# Altium PCB Copy of PCB_soldeerstation.PcbDoc
Units mm, origin at the board's own origin, x right, y up, seen from the top; angles counter-clockwise.
Board outline 142.24 x 151.13 mm, 2 copper layers (Top Layer, Bottom Layer); 76 components, 77 nets, 276 pads, 0 vias.
Unrouted connection lines stored in the file: 181.
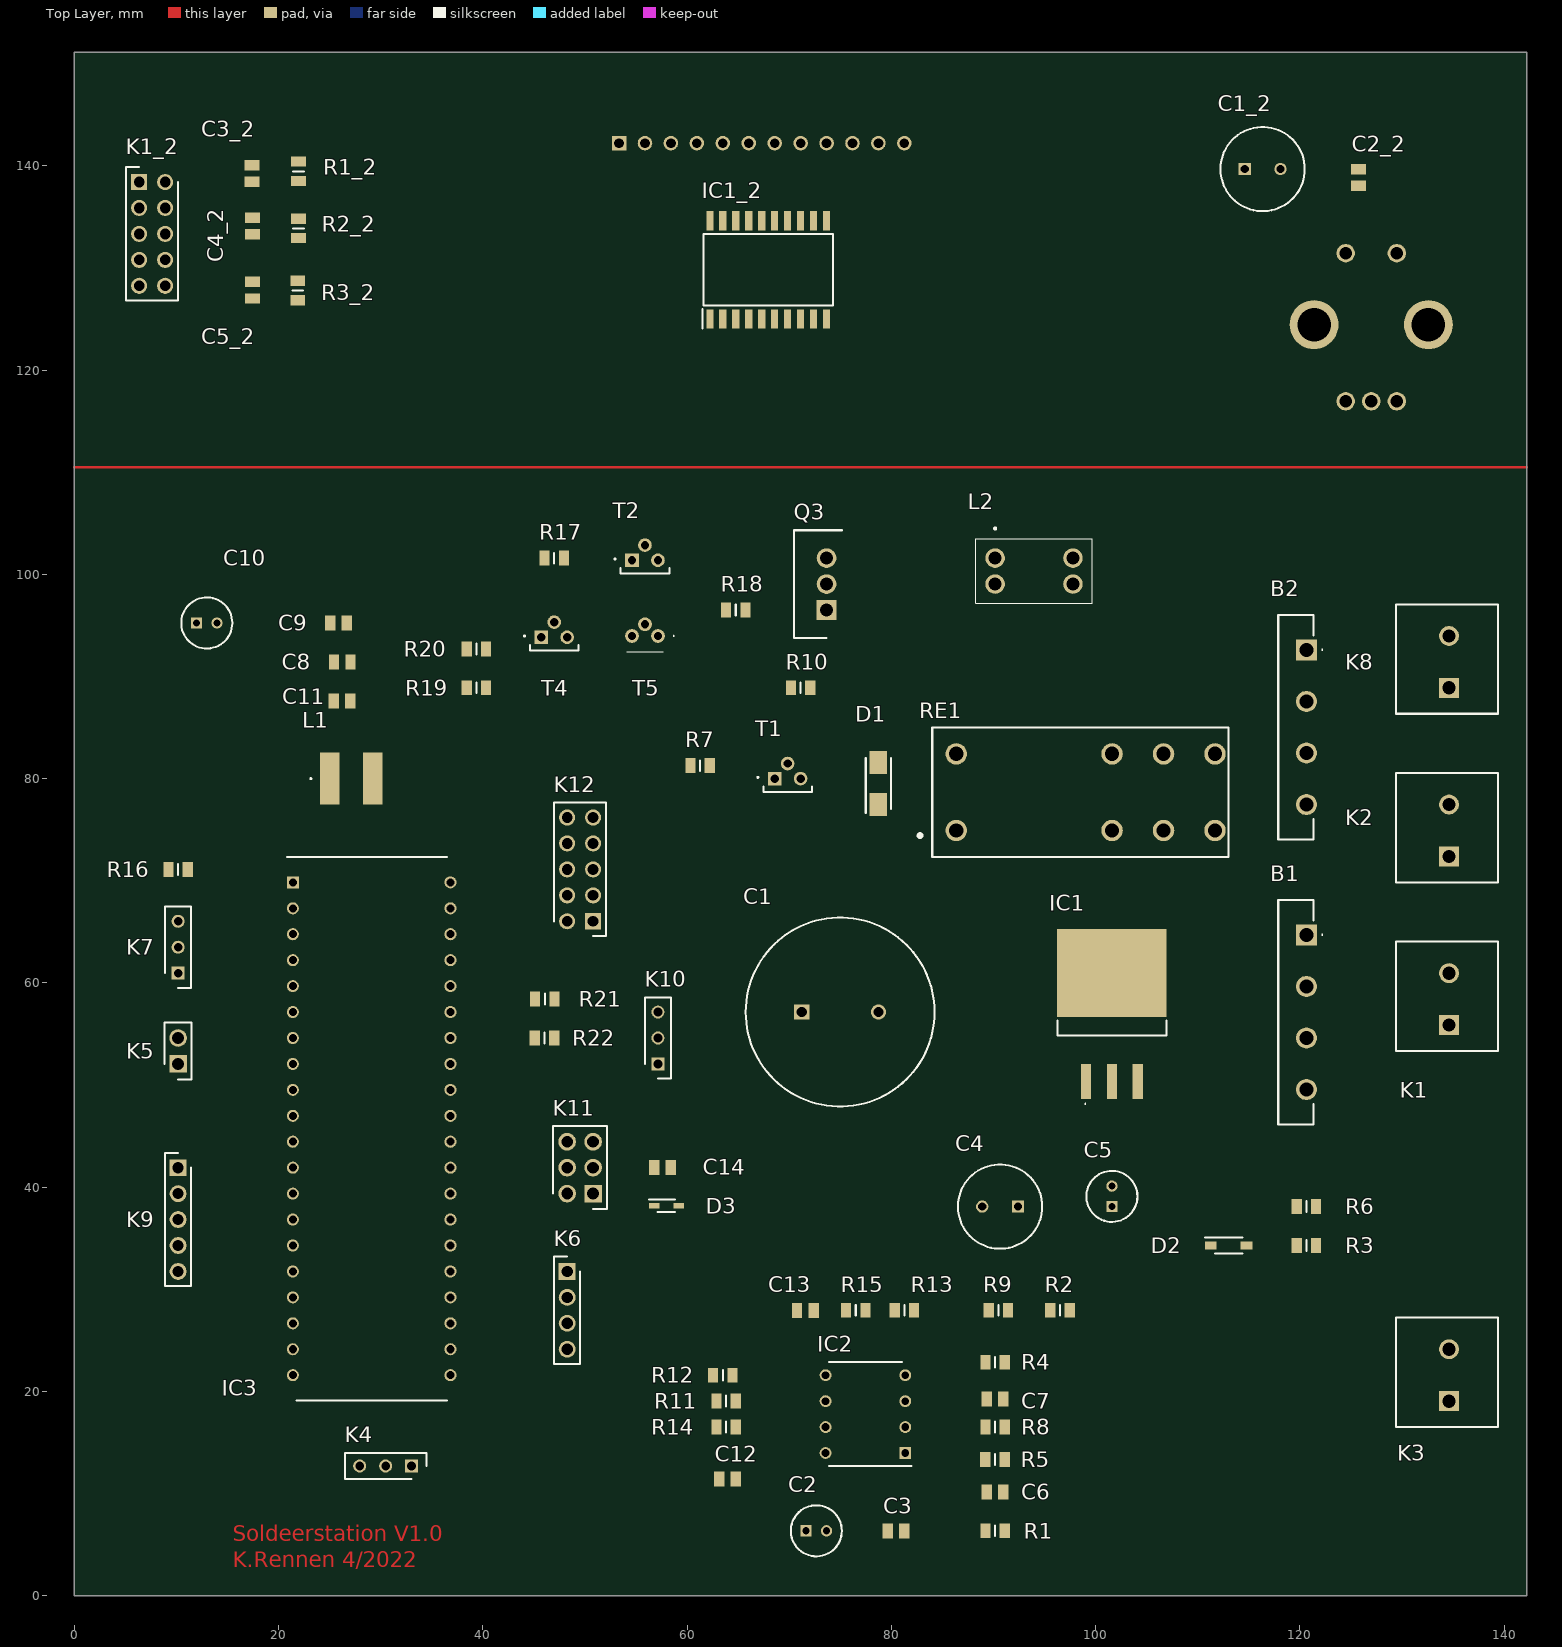
[diagram p0: Top Layer view]
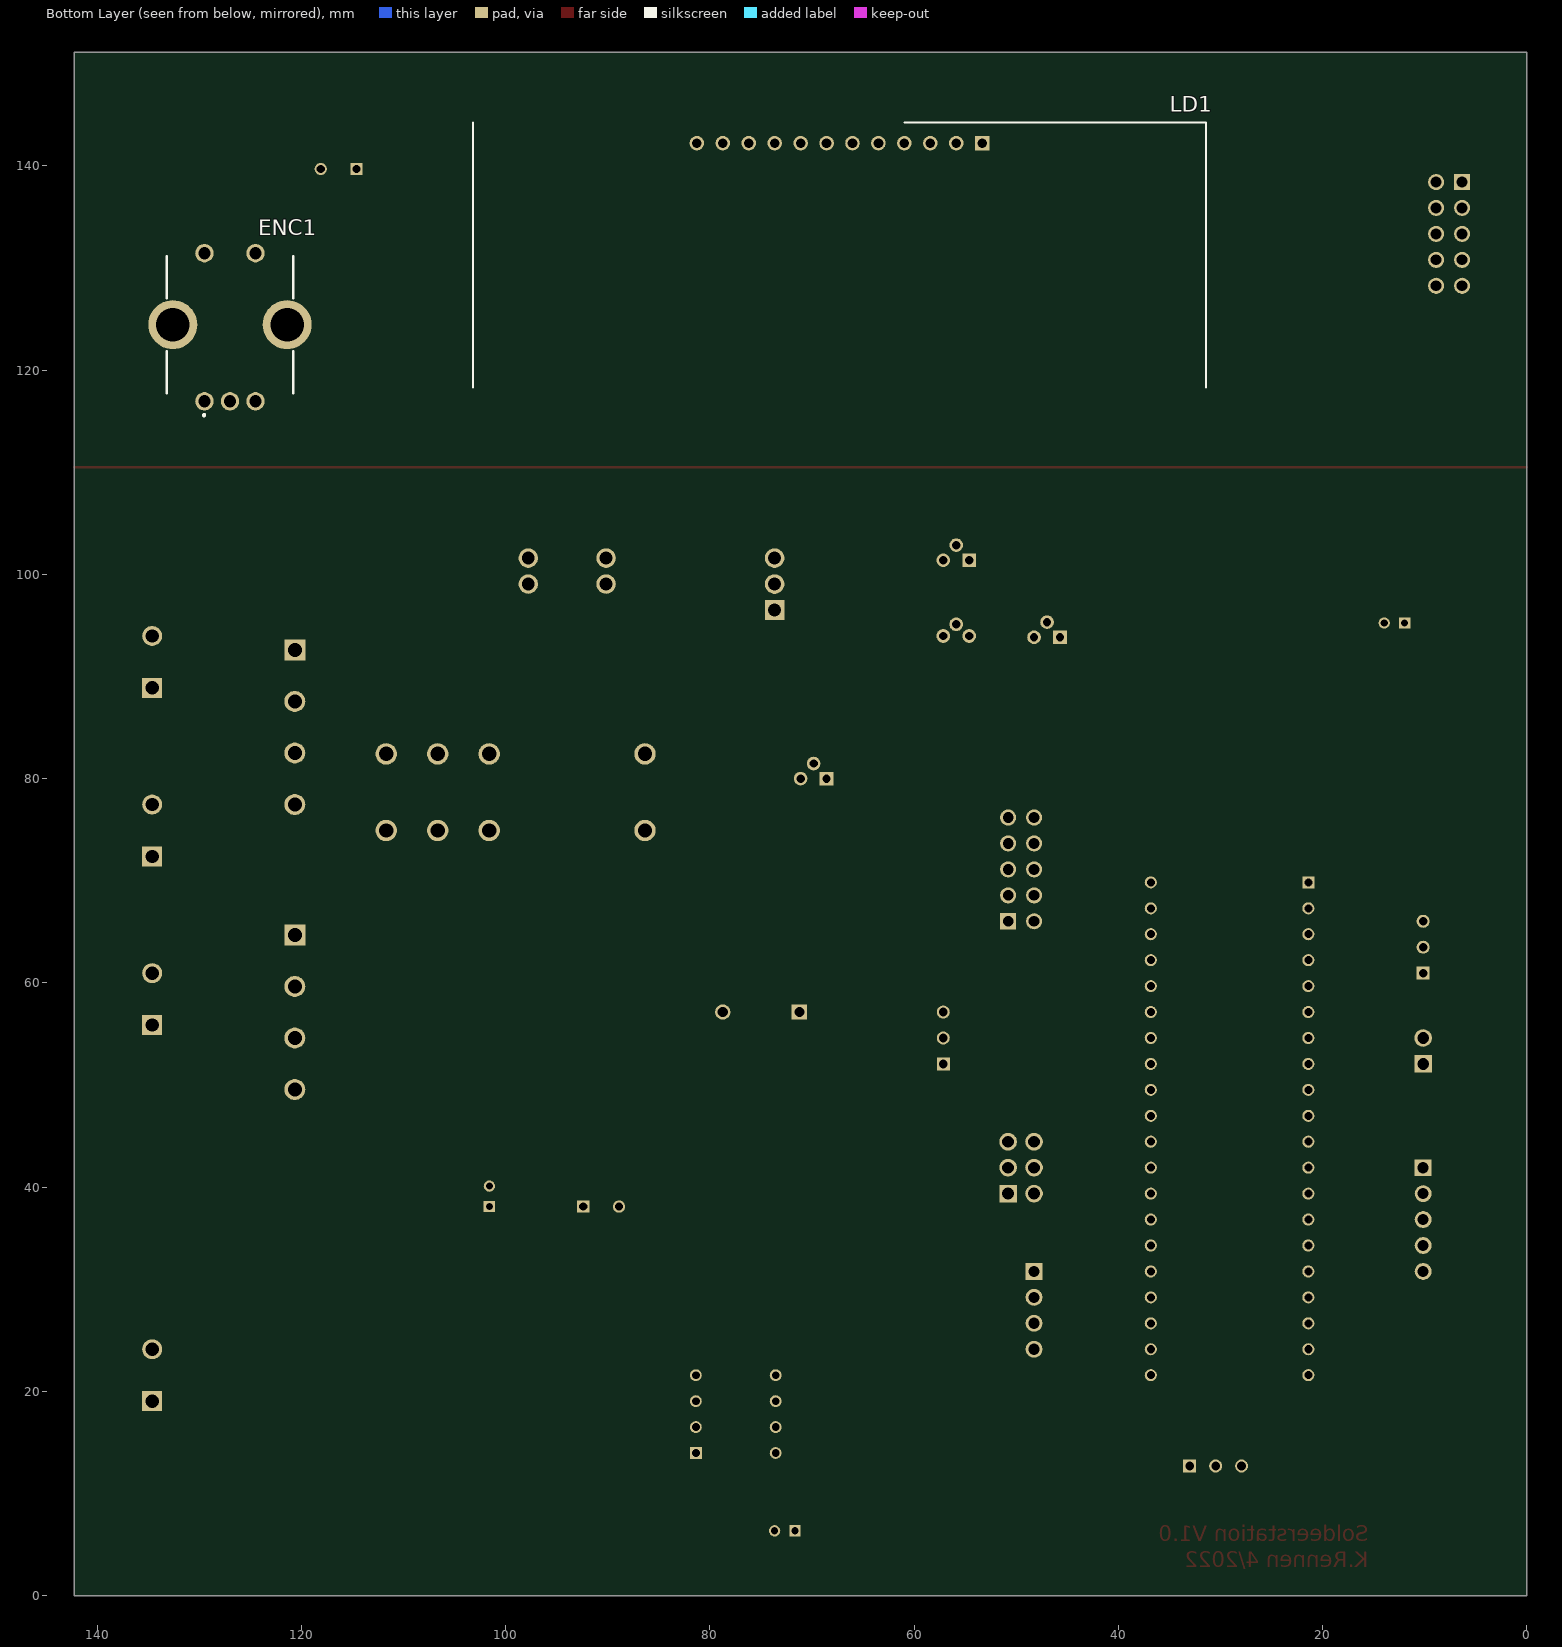
[diagram p1: Bottom Layer view, seen from below]

## Layer stack, top to bottom
Top Solder: solder mask 0.0102, Solder Resist, Dk 3.5
Top Layer: signal copper 0.0356
Dielectric 1: dielectric 0.32, FR-4, Dk 4.8
Bottom Layer: signal copper 0.0356
Bottom Solder: solder mask 0.0102, Solder Resist, Dk 3.5

## Board outline
0,0 0,151.13 142.24,151.13 142.24,0

## Design rules (kind name [scope] priority, off if disabled: settings)
Clearance [All] p1: gap=0.254 ignorepadtopadclearanceinfootprint=FALSE except(0: Arc-Hole Track-Hole SMDPad-Hole THPad-Hole Via-Hole Fill-Hole Poly-Hole Region-Hole Text-Hole)
PolygonConnect [All] p1: connectstyle=Relief reliefconductorwidth=0.254 reliefentries=4 polygonreliefangle="90 Angle" airgapwidth=0.254
RoutingVias [All] p1: holewidth=0.6 width=1.1 viastyle="Through Hole" minholewidth=0.6 minwidth=1.1 maxholewidth=0.6 maxwidth=1.1
SolderMaskExpansion [All] p1: expansion=0.102 istentingtop=FALSE
Width [All] p1: maxlimit=1.27 minlimit=0.635 preferedwidth=0.635 minimp=50.000000 maximp=50.000000 favimp=50.000000
30 further rules are at their usual default settings.

## Components (designator, comment, footprint, x,y, rotation, side; value= is the part's Value field where it differs from the comment)
B1 "bruggelijkrichter" GBU606G 120.65,64.71 r90 top
B2 "bruggelijkrichter" GBU606G 120.65,92.62 r90 top
C1 "4700uF" 4700uf 71.24,57.15 r0 top
C1_2 "100uF" 100uf 114.61,139.7 r0 top
C2 "10uF" 10uf 71.66,6.35 r0 top
C2_2 "100nF" 100nF 125.73,138.89 r90 top
C3 "100nF" 100nF 80.47,6.35 r0 top
C3_2 "10nF" 10nF 17.405,139.251 r90 top
C4 "100uF" 100uf 92.4,38.1 r180 top
C4_2 "10nF" 10nF 17.439,134.115 r90 top
C5 "10uF" 10uf 101.6,38.1 r90 top
C5_2 "10nF" 10nF 17.439,127.838 r90 top
C6 "10nF" 10nF 90.17,10.16 r0 top
C7 "10nF" 10nF 90.17,19.259 r0 top
C8 "100nF" 100nF 26.237,91.443 r0 top
C9 "100nF" 100nF 25.86,95.25 r0 top
C10 "10uF" 10uf 11.97,95.25 r0 top
C11 "100nF" 100nF 26.21,87.63 r0 top
C12 "10nF" 10nF 63.96,11.43 r0 top
C13 "10nF" 10nF 71.58,27.94 r0 top
C14 "100nF" 100nF 57.61,41.91 r0 top
D1 "FM4007W-W" fm4007 78.74,79.52 r90 top
D2 "MMSZ4689T1G zener" mmsz4 113.03,34.29 r0 top
D3 "SMMDL914T1G" smmdl914 57.982,38.183 r0 top
ENC1 "PEC11R-4225F-S0024 encoder" PEC11R-4225F-S0024 127,124.46 r180 bottom
IC1 "TL780-05CKTTR" TL78005CKTTR 101.6,57.105 r0 top net-tie
IC1_2 "TM1637" tm1637 67.945,129.82 r90 top
IC2 "MCP6002-E_P dual opamp" mcp6002 77.47,17.78 r180 top
IC3 "ATMEGA4809-PF" ATMEGA4809-PF 29.115,45.72 r0 top
K1 "schroefconnector" schroefconnector 134.62,55.88 r90 top
K1_2 "10 boxheader" 10BoxHeader 6.35,138.43 r270 top
K2 "schroefconnector" schroefconnector 134.62,72.39 r90 top
K3 "schroefconnector" schroefconnector 134.62,19.05 r90 top
K4 "1x3header" HDR1X3 33.02,12.7 r180 top
K5 "1x2header" HDR1X2 10.16,52.07 r90 top
K6 "1x4header" HDR1X4 48.26,31.75 r270 top
K7 "1x3header" HDR1X3 10.16,60.96 r90 top
K8 "schroefconnector" schroefconnector 134.62,88.9 r90 top
K9 "1x5header" HDR1X5 10.16,41.91 r270 top
K10 "1x3header" HDR1X3 57.15,52.07 r90 top
K11 "2x3header" HDR2X3 50.8,39.37 r90 top
K12 "10 boxheader" 10BoxHeader 50.8,66.04 r90 top
L1 "smoorspoel" smoorspoel 27.11,80.01 r0 top
L2 "cmsmoorspoel" CMsmoorspoel 90.17,101.6 r270 top
LD1 "KW4-804CVB" kw4 60.96,142.24 r270 bottom
Q3 "IRF9Z34NPBF" irf9z34npbf 73.66,96.52 r90 top
R1 "18k" 18k 90.17,6.35 r0 top
R1_2 "10k" 10k 21.939,139.481 r90 top
R2 "1M" 1M 96.52,27.94 r0 top
R2_2 "10k" 10k 21.939,133.885 r90 top
R3 "68k" 68k 120.65,34.29 r0 top
R3_2 "10k" 10k 21.87,127.804 r90 top
R4 "5k6" 5k6 90.17,22.86 r0 top
R5 "5k6" 5k6 90.151,13.333 r0 top
R6 "10k" 10k 120.65,38.1 r0 top
R7 "10k" 10k 61.28,81.28 r0 top
R8 "100E" 100ohm 90.17,16.51 r0 top
R9 "10M" 10M 90.49,27.94 r0 top
R10 "4k7" 4k7 71.12,88.9 r0 top
R11 "18k" 18k 63.82,19.05 r0 top
R12 "18k" 18k 63.5,21.59 r0 top
R13 "5k6" 5k6 81.28,27.94 r0 top
R14 "5k6" 5k6 63.82,16.51 r0 top
R15 "100E" 100ohm 76.52,27.94 r0 top
R16 "4k7" 4k7 10.16,71.12 r180 top
R17 "4k7" 4k7 46.99,101.6 r0 top
R18 "100E" 100ohm 64.77,96.52 r0 top
R19 "10k" 10k 39.37,88.9 r0 top
R20 "4k7" 4k7 39.37,92.71 r0 top
R21 "4k7" 4k7 46.069,58.429 r0 top
R22 "4k7" 4k7 46.04,54.61 r0 top
RE1 "RT424005 relais" RT42005 86.36,78.68 r0 top
T1 "BC547" BC547CBU 68.58,80.137 r0 top
T2 "BC547" BC547CBU 54.61,101.52 r0 top
T4 "BC547" BC547CBU 45.72,93.98 r0 top
T5 "BC557" BC557C 57.15,93.98 r180 top

## Footprints (in the part's own frame and the unit in brackets; to place one, negate y for a bottom-side part, rotate by r counter-clockwise, add the part's x,y. Pads: shape width x height; smd on the part's side, far side on the other; paste and mask are expansions set on the pad)
1M [mm]
  rect 1x1.45 smd: 1(-0.95,0) 2(0.95,0)
  silkscreen extent 0,-0.53 0,0.53, body extent -1,-0.63 1,0.63, height 0.65
4k7 [mm]
  rect 1x1.45 smd: 1(-0.95,0) 2(0.95,0)
  silkscreen extent 0,-0.53 0,0.53, body extent -1,-0.63 1,0.63, height 0.65
5k6 [mm]
  rect 1x1.45 smd: 1(-0.95,0) 2(0.95,0)
  silkscreen extent 0,-0.53 0,0.53, body extent -1,-0.63 1,0.63, height 0.65
10BoxHeader [mm]
  rect 1.575x1.575 hole 1.05: 1(0,0)
  round 1.575 hole 1.05: 2(0,2.54) 3(2.54,0) 4(2.54,2.54) 5(5.08,0) 6(5.08,2.54) 7(7.62,0) 8(7.62,2.54) 9(10.16,0) 10(10.16,2.54)
  silkscreen extent -1.46,-1.27 11.62,3.81, body extent -1.27,-1.27 11.43,3.81, height 8.64
10k [mm]
  rect 1x1.45 smd: 1(-0.95,0) 2(0.95,0)
  silkscreen extent 0,-0.52 0,0.52, body extent -1,-0.63 1,0.63, height 0.65
10M [mm]
  rect 1x1.45 smd: 1(-0.95,0) 2(0.95,0)
  silkscreen extent 0,-0.53 0,0.53, body extent -1,-0.63 1,0.63, height 0.65
10nF [mm]
  rect 1.02x1.47 smd: 1(-0.81,0) 2(0.81,0)
  body extent -1,-0.63 1,0.63, height 0.94
10uf [mm]
  rect 1.1x1.1 hole 0.7: 1(0,0)
  round 1.1 hole 0.7: 2(2,0)
  silkscreen extent -1.5,-2.5 3.5,2.5
18k [mm]
  rect 1x1.45 smd: 1(-0.95,0) 2(0.95,0)
  silkscreen extent 0,-0.53 0,0.53, body extent -1,-0.63 1,0.63, height 0.65
68k [mm]
  rect 1x1.45 smd: 1(-0.95,0) 2(0.95,0)
  silkscreen extent 0,-0.53 0,0.53, body extent -1,-0.63 1,0.63, height 0.65
100nF [mm]
  rect 1.02x1.47 smd: 1(-0.81,0) 2(0.81,0)
  body extent -1,-0.63 1,0.63, height 0.94
100ohm [mm]
  rect 1x1.45 smd: 1(-0.95,0) 2(0.95,0)
  silkscreen extent 0,-0.53 0,0.53, body extent -1,-0.63 1,0.63, height 0.65
100uf [mm]
  rect 1.2x1.2 hole 0.8: 1(0,0)
  round 1.2 hole 0.8: 2(3.5,0)
  silkscreen extent -2.38,-4.12 5.87,4.12
4700uf [mm]
  rect 1.5x1.5 hole 1: 1(0,0)
  round 1.5 hole 1: 2(7.5,0)
  silkscreen extent -5.5,-9.25 13,9.25
ATMEGA4809-PF [mm]
  rect 1.184x1.184 hole 0.784: 1(-7.715,24.13)
  round 1.184 hole 0.784: 2(-7.715,21.59) 3(-7.715,19.05) 4(-7.715,16.51) 5(-7.715,13.97) 6(-7.715,11.43) 7(-7.715,8.89) 8(-7.715,6.35) 9(-7.715,3.81) 10(-7.715,1.27) 11(-7.715,-1.27) 12(-7.715,-3.81) 13(-7.715,-6.35) 14(-7.715,-8.89) 15(-7.715,-11.43) 16(-7.715,-13.97) 17(-7.715,-16.51) 18(-7.715,-19.05) 19(-7.715,-21.59) 20(-7.715,-24.13) 21(7.715,-24.13) 22(7.715,-21.59) 23(7.715,-19.05) 24(7.715,-16.51) 25(7.715,-13.97) 26(7.715,-11.43) 27(7.715,-8.89) 28(7.715,-6.35) 29(7.715,-3.81) 30(7.715,-1.27) 31(7.715,1.27) 32(7.715,3.81) 33(7.715,6.35) 34(7.715,8.89) 35(7.715,11.43) 36(7.715,13.97) 37(7.715,16.51) 38(7.715,19.05) 39(7.715,21.59) 40(7.715,24.13)
  silkscreen extent -8.31,-26.61 7.37,26.61, body extent -7.86,-25.88 7.86,25.88, height 6.35
BC547CBU [mm]
  rect 1.333x1.333 hole 0.82: 1(0,-0.127)
  round 1.333 hole 0.82: 2(1.27,1.35) 3(2.54,-0.127)
  silkscreen extent -1.7,-1.43 3.65,0.05, body extent -1.11,-1.43 3.65,2.19, height 5.43
BC557C [mm]
  round 1.35 hole 0.81: 1(0,0) 2(1.27,-1.143) 3(2.54,0)
  silkscreen extent -1.6,-0.05 3.07,1.55
CMsmoorspoel [mm]
  round 1.905 hole 1.27: 1(0,0) 2(2.54,0) 3(2.54,7.62) 4(0,7.62)
  silkscreen extent -3,-1.88 4.42,9.5, body extent -1.88,-1.88 4.42,9.5, height 9.6
fm4007 [mm]
  rect 2.25x1.7 smd: 1(-2.05,0) 2(2.05,0)
  silkscreen extent -2.9,-1.24 2.5,1.24, body extent -2.5,-1.24 2.5,1.24, height 2.31
GBU606G [mm]
  rect 2.055x2.055 hole 1.37: 1(0,0)
  round 2.055 hole 1.37: 2(-5.05,0) 3(-10.1,0) 4(-15.15,0)
  silkscreen extent -18.58,-1.6 3.42,2.75, body extent -18.57,-0.69 3.43,2.76, height 21.05
HDR1X2 [mm]
  rect 1.725x1.725 hole 1.15: 1(0,0)
  round 1.725 hole 1.15: 2(2.54,0)
  silkscreen extent -1.52,-1.32 4.06,1.32, body extent -1.27,-1.27 3.81,1.27, height 8.74
HDR1X3 [mm]
  rect 1.275x1.275 hole 0.85: 1(0,0)
  round 1.275 hole 0.85: 2(2.54,0) 3(5.08,0)
  silkscreen extent -1.45,-1.27 6.53,1.27, body extent -1.27,-1.27 6.35,1.27, height 8.64
HDR1X4 [mm]
  rect 1.65x1.65 hole 1.1: 1(0,0)
  round 1.65 hole 1.1: 2(2.54,0) 3(5.08,0) 4(7.62,0)
  silkscreen extent -1.45,-1.27 9.07,1.27, body extent -1.27,-1.27 8.89,1.27, height 8.34
HDR1X5 [mm]
  rect 1.65x1.65 hole 1.1: 1(0,0)
  round 1.65 hole 1.1: 2(2.54,0) 3(5.08,0) 4(7.62,0) 5(10.16,0)
  silkscreen extent -1.45,-1.27 11.61,1.27, body extent -1.27,-1.27 11.43,1.27, height 8.64
HDR2X3 [mm]
  rect 1.725x1.725 hole 1.15: 1(0,0)
  round 1.725 hole 1.15: 2(0,2.54) 3(2.54,0) 4(2.54,2.54) 5(5.08,0) 6(5.08,2.54)
  silkscreen extent -1.52,-1.37 6.6,3.91, body extent -1.27,-1.27 6.35,3.81, height 8.38
irf9z34npbf [mm]
  rect 1.92x1.92 hole 1.28: 1(0,0)
  round 1.92 hole 1.28: 2(2.54,0) 3(5.08,0)
  silkscreen extent -2.73,-1.49 7.81,3.2, body extent -2.67,-1.5 7.75,3.19, height 18.84
kw4 [mm]
  rect 1.425x1.425 hole 0.95: 1(0,7.62)
  round 1.425 hole 0.95: 2(0,5.08) 3(0,2.54) 4(0,0) 5(0,-2.54) 6(0,-5.08) 7(0,-7.62) 8(0,-10.16) 9(0,-12.7) 10(0,-15.24) 11(0,-17.78) 12(0,-20.32)
  silkscreen extent -2.02,-42.23 23.93,29.53
mcp6002 [mm]
  rect 1.158x1.158 hole 0.758: 1(-3.905,3.81)
  round 1.158 hole 0.758: 2(-3.905,1.27) 3(-3.905,-1.27) 4(-3.905,-3.81) 5(3.905,-3.81) 6(3.905,-1.27) 7(3.905,1.27) 8(3.905,3.81)
  silkscreen extent -4.48,-5.08 3.56,5.08, body extent -4.04,-4.75 4.04,4.75, height 5.33
mmsz4 [mm]
  rect 1.15x0.8 smd: 1(-1.75,0) 2(1.75,0)
  silkscreen extent -2.33,-0.8 1.34,0.8, body extent -1.86,-0.8 1.86,0.8, height 1.35
PEC11R-4225F-S0024 [mm]
  round 1.8 hole 1.2: 1(-2.5,-7.5) 2(2.5,-7.5) 3(0,-7.5) 4(-2.5,7) 5(2.5,7)
  round 4.8 hole 3.28: 6(5.6,0) 7(-5.6,0)
  silkscreen extent -6.2,-8.95 6.2,6.7, body extent -7,-7.75 6.99,7.15, height 31.51
RT42005 [mm]
  round 2.1 hole 1.4: 1(0,-3.75) 2(15.26,-3.75) 3(20.3,-3.75) 4(25.34,-3.75) 5(25.34,3.75) 6(20.3,3.75) 7(15.26,3.75) 8(0,3.75)
  silkscreen extent -3.67,-6.35 26.65,6.35, body extent -2.21,-6.35 26.79,6.35, height 15.86
schroefconnector [mm]
  rect 1.95x1.95 hole 1.3: 1(0,0)
  round 1.95 hole 1.3: 2(5.08,0)
  silkscreen extent -2.54,-4.8 8.17,5.2, body extent -2.54,-4.8 8.17,5.2, height 13.8
smmdl914 [mm]
  rect 1x0.5 smd: 1(-1.2,0) 2(1.2,0)
  silkscreen extent -1.7,-0.62 0.85,0.63, body extent -1.25,-0.63 1.25,0.63, height 1.1
smoorspoel [mm]
  rect 1.9x5.1 smd: 1(-2.1,0) 2(2.1,0)
  silkscreen extent -4,-0.05 -3.9,0.05, body extent -3.15,-3 3.15,3, height 4.5
TL78005CKTTR [mm]
  rect 1x3.4 smd: 1(-2.54,-6.745) 2(0,-6.745) 3(2.54,-6.745)
  rect 10.7x8.6 smd: 4(0,3.855)
  silkscreen extent -5.33,-9 5.33,-0.8
tm1637 [mm]
  rect 1.9x0.7 smd: 1(-4.8,5.715) 2(-4.8,4.445) 3(-4.8,3.175) 4(-4.8,1.905) 5(-4.8,0.635) 6(-4.8,-0.635) 7(-4.8,-1.905) 8(-4.8,-3.175) 9(-4.8,-4.445) 10(-4.8,-5.715) 11(4.8,-5.715) 12(4.8,-4.445) 13(4.8,-3.175) 14(4.8,-1.905) 15(4.8,-0.635) 16(4.8,0.635) 17(4.8,1.905) 18(4.8,3.175) 19(4.8,4.445) 20(4.8,5.715)
  silkscreen extent -5.75,-6.35 3.5,6.42, body extent -5.23,-6.35 5.23,6.35, height 2.8

## Part data
B1 B2: "Bridge Rectifier GBU606-G", Manufacturer_Name="Comchip Technology", Manufacturer_Part_Number=GBU606-G, Datasheet Link=https://www.comchiptech.com/product.php?id=2217, Height=20.95mm
C1: "Capacitor Polarised 50PK4700MEFC18X40", Manufacturer_Name=Rubycon, Manufacturer_Part_Number=50PK4700MEFC18X40, Mouser2 Part Number=232-50PK4700MEFC18X4, Datasheet Link=https://componentsearchengine.com//50PK4700MEFC18X40.pdf, Height=41.5mm, Mouser2 Price/Stock=https://www.mouser.com/Search/Refine.aspx?Keyword=232-50PK4700MEFC18X4
C1_2 C4: "Capacitor Polarised RGA101M1HBK-0811G", Manufacturer_Name=Lelon, Manufacturer_Part_Number=RGA101M1HBK-0811G, Datasheet Link=https://www.arrow.com/en/products/rga101m1hbk-0811g/lelon-electronics, Height=13mm
C2 C5 C10: "Capacitor Polarised 860020672010", Manufacturer_Name="Wurth Elektronik", Manufacturer_Part_Number=860020672010, Mouser2 Part Number=710-860020672010, Datasheet Link=https://componentsearchengine.com//860020672010.pdf, Height=12.5mm, Mouser2 Price/Stock=https://www.mouser.com/Search/Refine.aspx?Keyword=710-860020672010
C2_2 C3 C3_2 C4_2 C5_2 C6 C7 C8 C9 C11 C12 C13 C14: "Capacitor", Manufacturer_Name=AVX, Manufacturer_Part_Number=0402YC104MAT2A, Mouser Part Number=581-0402YC104MAT2A, Datasheet Link=http://www.mouser.com/catalog/supplier/library/pdf/AVXSurfaceMountCeramic.pdf, Height=0.56mm, Mouser Price/Stock=https://www.mouser.co.uk/ProductDetail/AVX/0402YC104MAT2A?qs=O2%2FeDh0sX9yiCaLwpXy1bw%3D%3D
D1: "Bridge Rectifier", Manufacturer_Name=Rectron, Mouser2 Part Number=583-FM4007W-W, Datasheet Link=https://componentsearchengine.com//FM4007W-W.pdf, Height=2.31mm, Manufacturer_Part_Number=FM4007W-W, Mouser2 Price/Stock=https://www.mouser.com/Search/Refine.aspx?Keyword=583-FM4007W-W
D2: "Zener Diode", Manufacturer_Name="ON Semiconductor", Manufacturer_Part_Number=MMSZ4689T1G, Mouser2 Part Number=863-MMSZ4689T1G, Datasheet Link=https://componentsearchengine.com//MMSZ4689T1G.pdf, Height=1.35mm, Mouser2 Price/Stock=https://www.mouser.com/Search/Refine.aspx?Keyword=863-MMSZ4689T1G
D3: "Diode SMMDL914T1G", Manufacturer_Name="ON Semiconductor", Mouser2 Part Number=863-SMMDL914T1G, Datasheet Link=https://componentsearchengine.com//SMMDL914T1G.pdf, Height=1.1mm, Manufacturer_Part_Number=SMMDL914T1G, Mouser2 Price/Stock=https://www.mouser.com/Search/Refine.aspx?Keyword=863-SMMDL914T1G
ENC1: "draai encoder met drukknop", Arrow Part Number=PEC11R-4225F-S0024, Manufacturer_Name=Bourns, Mouser Part Number=652-PEC11R-4225F-S24, Arrow Price/Stock=https://www.arrow.com/en/products/pec11r-4225f-s0024/bourns?region=nac, Datasheet Link=https://componentsearchengine.com/Datasheets/1/PEC11R-4225F-S0024.pdf, Manufacturer_Part_Number=PEC11R-4225F-S0024, Mouser Price/Stock=https://www.mouser.co.uk/ProductDetail/Bourns/PEC11R-4225F-S0024?qs=Zq5ylnUbLm4N6UNkPX3pkQ%3D%3D
IC1: "Integrated Circuit spanningsregelaar", Manufacturer_Name="Texas Instruments", Datasheet Link=http://www.ti.com/general/docs/suppproductinfo.tsp?distId=26&gotoUrl=http%3A%2F%2Fwww.ti.com%2Flit%2Fgpn%2Ftl780, Height=5.08mm, Manufacturer_Part_Number=TL780-05CKTTR
IC1_2: library part TM1637__SOP_, "Integrated Circuit", Manufacturer_Name="TITAN MICRO ELECTRONICS", Manufacturer_Part_Number="TM1637 (SOP)", Datasheet Link=https://www.mcielectronics.cl/website_MCI/static/documents/Datasheet_TM1637.pdf, Height=2.8mm
IC2: "Integrated Circuit", Manufacturer_Name=Microchip, Manufacturer_Part_Number=MCP6002-E/P, Mouser2 Part Number=579-MCP6002-E/P, Datasheet Link=https://componentsearchengine.com//MCP6002-E_P.pdf, Height=5.334mm, Mouser2 Price/Stock=https://www.mouser.com/Search/Refine.aspx?Keyword=579-MCP6002-E%2FP
IC3: "Integrated Circuit", Manufacturer_Name=Microchip, Mouser Part Number=556-ATMEGA4809-PF, Datasheet Link=http://ww1.microchip.com/downloads/en/DeviceDoc/40-pin-Data-Sheet-megaAVR-0-series-DS40002104A.pdf, Height=6.35mm, Manufacturer_Part_Number=ATMEGA4809-PF, Mouser Price/Stock=https://www.mouser.co.uk/ProductDetail/Microchip-Technology-Atmel/ATMEGA4809-PF?qs=T3oQrply3y9UlpZbCygk%252BQ%3D%3D
K1 K2 K3 K8: "Connector 1716020000", Manufacturer_Name=Weidmuller, Manufacturer_Part_Number=1716020000, Datasheet Link=https://catalog.weidmueller.com/catalog/Start.do?ObjectID=1716020000&_ga=2.21797499.1716783809.1613378202-511725545.1613378202
K1_2 K12: "Connector", Arrow Part Number=0010897100, Manufacturer_Name=Molex, Mouser Part Number=N/A, Arrow Price/Stock=https://www.arrow.com/en/products/0010897100/molex?region=nac, Datasheet Link=http://www.molex.com/pdm_docs/sd/010897100_sd.pdf, Height=8.64mm, Manufacturer_Part_Number=0010897100, Mouser Price/Stock=https://www.mouser.co.uk/ProductDetail/Molex/0010897100?qs=PBcRNPEHKsqIDCZzUxhahw%3D%3D
K4 K7 K10: "Connector", Arrow Part Number=0022035035, Manufacturer_Name=Molex, Mouser Part Number=N/A, Arrow Price/Stock=https://www.arrow.com/en/products/0022035035/molex, Datasheet Link=https://www.molex.com/pdm_docs/sd/022035035_sd.pdf, Height=6.1mm, Manufacturer_Part_Number=0022035035, Mouser Price/Stock=https://www.mouser.co.uk/ProductDetail/Molex/0022035035?qs=PBcRNPEHKsp8%252BOnk6fhZPA%3D%3D
K5: "Connector", Arrow Part Number=0022232021, Manufacturer_Name=Molex, Mouser Part Number=N/A, Arrow Price/Stock=https://www.arrow.com/en/products/0022232021/molex?region=europe, Datasheet Link=https://www.molex.com/webdocs/datasheets/pdf/en-us//0022232021_PCB_HEADERS.pdf, Height=11.05mm, Manufacturer_Part_Number=0022232021, Mouser Price/Stock=https://www.mouser.co.uk/ProductDetail/Molex/0022232021?qs=PBcRNPEHKspVhuxYRaP9bQ%3D%3D
K6: "Connector", Arrow Part Number=0009652048, Manufacturer_Name=Molex, Mouser Part Number=N/A, Arrow Price/Stock=https://www.arrow.com/en/products/0009652048/molex?region=europe, Datasheet Link=https://www.molex.com/pdm_docs/sd/009652048_sd.pdf, Height=14.25mm, Manufacturer_Part_Number=0009652048, Mouser Price/Stock=https://www.mouser.co.uk/ProductDetail/Molex/0009652048?qs=PBcRNPEHKsr%252BMEGD33m%2F9w%3D%3D
K9: "Connector", Arrow Part Number=0353620550, Manufacturer_Name=Molex, Mouser Part Number=N/A, Arrow Price/Stock=https://www.arrow.com/en/products/0353620550/molex, Datasheet Link=https://www.molex.com/pdm_docs/sd/353620550_sd.pdf, Height=8.5mm, Manufacturer_Part_Number=0353620550, Mouser Price/Stock=https://www.mouser.com/Search/Refine.aspx?Keyword=N%2FA
K11: "Connector", Arrow Part Number=10129381-906002BLF, Manufacturer_Name=Amphenol, Mouser Part Number=649-1012938190602BLF, Arrow Price/Stock=https://www.arrow.com/en/products/10129381-906002blf/amphenol-fci?region=europe, Datasheet Link=https://componentsearchengine.com/Datasheets/1/10129381-906002BLF.pdf, Height=8.58mm, Manufacturer_Part_Number=10129381-906002BLF, Mouser Price/Stock=https://www.mouser.co.uk/ProductDetail/Amphenol-FCI/10129381-906002BLF?qs=DXv0QSHKF4zSKXKyBbBVMw%3D%3D
L1: "Inductor VLS6045EX-100M-H", Manufacturer_Name=TDK, Manufacturer_Part_Number=VLS6045EX-100M-H, Mouser2 Part Number=810-VLS6045EX-100M-H, Datasheet Link=https://componentsearchengine.com//VLS6045EX-100M-H.pdf, Mouser2 Price/Stock=https://www.mouser.com/Search/Refine.aspx?Keyword=810-VLS6045EX-100M-H
L2: "Transformer CM2545X171B-10", Manufacturer_Name="Laird Technologies", Manufacturer_Part_Number=CM2545X171B-10, Datasheet Link=https://datasheet.datasheetarchive.com/originals/dk/DKDS-7/122753.pdf, Height=9.5mm
LD1: "Display", Manufacturer_Name=Luckylight, Datasheet Link=https://www.tme.eu/Document/21b6c1f82a45ad996bb1bfe0c31af292/KW4-804XVB.pdf, Height=7.75mm, Manufacturer_Part_Number=KW4-804CVB
Q3: "MOSFET (P-Channel)", Manufacturer_Name=Infineon, Mouser2 Part Number=942-IRF9Z34NPBF, Datasheet Link=https://componentsearchengine.com//IRF9Z34NPBF.pdf, Height=4.69mm, Manufacturer_Part_Number=IRF9Z34NPBF, Mouser2 Price/Stock=https://www.mouser.com/Search/Refine.aspx?Keyword=942-IRF9Z34NPBF
R1 R1_2 R2 R2_2 R3 R3_2 R4 R5 R6 R7 R9 R10 R11 R12 R13 R14 R16 R17 R19 R20 R21 R22: "Resistor", Arrow Part Number=CPF0805B100RE1, Manufacturer_Name="TE Connectivity", Mouser Part Number=279-CPF0805B100RE1, Arrow Price/Stock=https://www.arrow.com/en/products/cpf0805b100re1/te-connectivity?region=nac, Datasheet Link=https://datasheet.datasheetarchive.com/originals/distributors/DKDS-21/401696.pdf, Height=0.65mm, Manufacturer_Part_Number=CPF0805B100RE1, Mouser Price/Stock=https://www.mouser.co.uk/ProductDetail/TE-Connectivity-Holsworthy/CPF0805B100RE1?qs=9ylKvqdyudkCWLPT1QvLZQ%3D%3D
R8 R15 R18: library part 100ohm, "Resistor", Arrow Part Number=CPF0805B100RE1, Manufacturer_Name="TE Connectivity", Mouser Part Number=279-CPF0805B100RE1, Arrow Price/Stock=https://www.arrow.com/en/products/cpf0805b100re1/te-connectivity?region=nac, Datasheet Link=https://datasheet.datasheetarchive.com/originals/distributors/DKDS-21/401696.pdf, Height=0.65mm, Manufacturer_Part_Number=CPF0805B100RE1, Mouser Price/Stock=https://www.mouser.co.uk/ProductDetail/TE-Connectivity-Holsworthy/CPF0805B100RE1?qs=9ylKvqdyudkCWLPT1QvLZQ%3D%3D
RE1: "Relay or Contactor", Manufacturer_Name="TE Connectivity", Manufacturer_Part_Number=RT424005, Mouser2 Part Number=655-RT424005, Datasheet Link=https://componentsearchengine.com//RT424005.pdf, Mouser2 Price/Stock=https://www.mouser.com/Search/Refine.aspx?Keyword=655-RT424005
T1 T2 T4: library part BC547CBU, "Transistor BJT NPN", Manufacturer_Name="ON Semiconductor", Datasheet Link=https://www.onsemi.com/pdf/datasheet/bc550-d.pdf, Height=5.33mm, Manufacturer_Part_Number=BC547CBU
T5: library part BC557C, "Transistor BJT PNP", Manufacturer_Name=NXP, Mouser Part Number=771-BC557C, Datasheet Link=http://uk.rs-online.com/web/p/products/1124775, Height=5.2mm, Manufacturer_Part_Number=BC557C, Mouser Price/Stock=https://www.mouser.co.uk/ProductDetail/NXP-Semiconductors/BC557C?qs=84A%2FDAdkstLO1yR4NjQrgg%3D%3D

## Nets (pads, with @x,y where several pads share a name; then routed paths per layer and width w, separated by ;. In a path a pad name is that pad's centre, name@x,y a point inside that pad or via, vN(x,y) a via of type N, cw(c..) or ccw(c..) an arc to the next point about the centre after c; other vN are vias at no path point)
+5: C2.2 C3.2 C5.2 C8.2 C9.2 C10.2 D1.1 D3.1 IC1.3 IC3.5 IC3.31 K6.4 K7.3 K11.2 K12.1 L1.2 R2.2 R16.2 R21.2 R22.2 RE1.1
+5-Display: C1_2.2 C2_2.2 C3_2.2 C4_2.2 C5_2.2 IC1_2.16 K1_2.1 R1_2.2 R2_2.2 R3_2.2
GND: B1.4 B2.4 C1.1 C2.1 C3.1 C4.1 C5.1 C6.1 C7.1 C8.1 C9.1 C10.1 C11.1 C12.1 C13.1 D2.2 IC1.2 IC1.4 IC3.6 IC3.18 IC3.32 K3.1 K6.1 K7.1 K10.3 K11.6 K12.10 L2.2 R6.1 R8.1 R9.1 R10.2 R15.1 R20.1 T1.3 T4.3 T5.1
GND-Display: C1_2.1 C2_2.1 ENC1.3 ENC1.4 IC1_2.1 K1_2.10
NetB1_2: B1.2 K2.1 RE1.7
NetB1_3: B1.3 B2.2 K1.1 RE1.3
NetB2_1: B2.1 C4.2 IC1.1
NetB2_3: B2.3 K1.2 RE1.6
NetC3_2_1: C3_2.1 ENC1.1 K1_2.5 R1_2.1
NetC4_2_1: C4_2.1 ENC1.2 K1_2.7 R2_2.1
NetC5_2_1: C5_2.1 ENC1.5 K1_2.3 R3_2.1
NetC6_2: C6.2 IC3.9 R5.1
NetC7_2: C7.2 IC2.3 R4.1
NetC11_2: C11.2 IC3.17 L1.1
NetC12_2: C12.2 IC3.10 R14.1
NetC13_2: C13.2 IC2.5 R13.1
NetC14_1: C14.1 K11.3
NetC14_2: C14.2 D3.2 IC3.29
NetD1_2: D1.2 RE1.8 T1.1
NetD2_1: D2.1 IC3.11 R3.1 R6.2
NetIC1_2_2: IC1_2.2 LD1.11
NetIC1_2_3: IC1_2.3 LD1.7
NetIC1_2_4: IC1_2.4 LD1.4
NetIC1_2_5: IC1_2.5 LD1.2
NetIC1_2_6: IC1_2.6 LD1.1
NetIC1_2_7: IC1_2.7 LD1.10
NetIC1_2_8: IC1_2.8 LD1.5
NetIC1_2_9: IC1_2.9 LD1.3
NetIC1_2_12: IC1_2.12 LD1.6
NetIC1_2_13: IC1_2.13 LD1.8
NetIC1_2_14: IC1_2.14 LD1.9
NetIC1_2_15: IC1_2.15 LD1.12
NetIC1_2_17: IC1_2.17 K1_2.4
NetIC1_2_18: IC1_2.18 K1_2.2
NetIC2_1: IC2.1 R1.1 R5.2
NetIC2_2: IC2.2 R1.2 R8.2
NetIC2_6: IC2.6 R12.2 R15.2
NetIC2_7: IC2.7 R11.1 R14.2
NetIC3_1: IC3.1 R19.1
NetIC3_2: IC3.2 K7.2 R16.1
NetIC3_7: IC3.7 K5.2
NetIC3_8: IC3.8 K5.1
NetIC3_12: IC3.12 K9.1
NetIC3_13: IC3.13 K9.2
NetIC3_14: IC3.14 K9.3
NetIC3_15: IC3.15 K9.4
NetIC3_16: IC3.16 K9.5
NetIC3_19: IC3.19 R7.1
NetIC3_20: IC3.20 K4.3
NetIC3_21: IC3.21 K4.2
NetIC3_22: IC3.22 K4.1
NetIC3_23: IC3.23 K6.3
NetIC3_24: IC3.24 K6.2
NetIC3_27: IC3.27 K11.1
NetIC3_28: IC3.28 K11.4
NetIC3_30: IC3.30 K11.5
NetIC3_33: IC3.33 K10.1
NetIC3_34: IC3.34 K10.2
NetIC3_35: IC3.35 K12.4 R22.1
NetIC3_36: IC3.36 K12.2 R21.1
NetIC3_37: IC3.37 K12.3
NetIC3_38: IC3.38 K12.5
NetIC3_39: IC3.39 K12.7
NetIC3_40: IC3.40 K12.9
NetK2_2: K2.2 RE1.2 RE1.5
NetK3_2: K3.2 R4.2
NetK8_1: K8.1 L2.3
NetK8_2: K8.2 L2.4
NetL2_1: L2.1 Q3.3
NetQ3_1: Q3.1 R18.2
NetR2_1: R2.1 R9.2 R13.2
NetR7_2: R7.2 R10.1 T1.2
NetR11_2: R11.2 R12.1
NetR17_1: R17.1 T2.2 T4.1 T5.2
NetR18_1: R18.1 T2.3 T5.3
NetR19_2: R19.2 R20.2 T4.2
VIN: B1.1 C1.2 Q3.2 R3.2 R17.2 T2.1
pads on no net: ENC1.6 ENC1.7 IC1_2.10 IC1_2.11 IC1_2.19 IC1_2.20 IC2.4 IC2.8 IC3.3 IC3.4 IC3.25 IC3.26 K1_2.6 K1_2.8 K1_2.9 K12.6 K12.8 RE1.4
copper on no net: | length 142.2
  Top Layer w0.254: 0,110.49 142.24,110.49

## Other copper
Top Layer:
  text "Soldeerstation V1.0" at 15.494,5.334 h1.52
  text "K.Rennen 4/2022" at 15.494,2.794 h1.52